# EAGLE board CT_schematic (EAGLE 7.6.0)

Size 100 x 80 mm. Coordinates in mm from the lower left corner, seen from the top.
Outline: 0,0 100,0 100,80 0,80 0,0
Copper layers (1*16): Top 0.035mm / dielectric 1.5mm / Bottom 0.035mm
Design rules "default": minimum track width 10mil, minimum drill 24mil, track to track 8mil, track to pad 8mil, pad to pad 8mil, via to via 8mil, smd to smd 8mil, copper to edge 40mil, drill to drill 8mil, minimum pad ring 10mil, minimum via ring 8mil, stop-mask expansion 4mil, vias tented up to drill 0mil, thermal gap 10mil

## Footprints (pad centres in the part's own frame; a part is rotated, then mirrored left to right if it is on the bottom)
C0603 = smd 0.8 x 0.8: 1 -0.762,0; 2 0.762,0
C0402 = smd 0.5 x 0.5: 1 -0.508,0; 2 0.508,0
C1210 = smd 1.2 x 2.5: 1 -1.524,0; 2 1.524,0
C0805 = smd 1.2 x 1.3: 1 -1.016,0; 2 1.016,0
EXV-9B = smd 2.718 x 1.778: 1 -2.108,0; 2 2.108,0
EXV-9H = smd 3.505 x 1.676: 1 -2.857,0; 2 2.857,0
L0603 = smd 0.8 x 0.8: 1 -0.762,0; 2 0.762,0
PJ-037B_PACKAGE = drill 3.7 square: 1 12,0 | drill 3.2 square: 2 6,0
R0603 = smd 0.8 x 0.8: 1 -0.762,0; 2 0.762,0
LQFP208 = smd 0.3 x 1.2: 1 -12.75,-14.4; 2 -12.25,-14.4; 3 -11.75,-14.4; 4 -11.25,-14.4; 5 -10.75,-14.4; 6 -10.25,-14.4; 7 -9.75,-14.4; 8 -9.25,-14.4; 9 -8.75,-14.4; 10 -8.25,-14.4; 11 -7.75,-14.4; 12 -7.25,-14.4; 13 -6.75,-14.4; 14 -6.25,-14.4; 15 -5.75,-14.4; 16 -5.25,-14.4; 17 -4.75,-14.4; 18 -4.25,-14.4; 19 -3.75,-14.4; 20 -3.25,-14.4; 21 -2.75,-14.4; 22 -2.25,-14.4; 23 -1.75,-14.4; 24 -1.25,-14.4; 25 -0.75,-14.4; 26 -0.25,-14.4; 27 0.25,-14.4; 28 0.75,-14.4; 29 1.25,-14.4; 30 1.75,-14.4; 31 2.25,-14.4; 32 2.75,-14.4; 33 3.25,-14.4; 34 3.75,-14.4; 35 4.25,-14.4; 36 4.75,-14.4; 37 5.25,-14.4; 38 5.75,-14.4; 39 6.25,-14.4; 40 6.75,-14.4; 41 7.25,-14.4; 42 7.75,-14.4; 43 8.25,-14.4; 44 8.75,-14.4; 45 9.25,-14.4; 46 9.75,-14.4; 47 10.25,-14.4; 48 10.75,-14.4; 49 11.25,-14.4; 50 11.75,-14.4; 51 12.25,-14.4; 52 12.75,-14.4; 105 12.75,14.4; 106 12.25,14.4; 107 11.75,14.4; 108 11.25,14.4; 109 10.75,14.4; 110 10.25,14.4; 111 9.75,14.4; 112 9.25,14.4; 113 8.75,14.4; 114 8.25,14.4; 115 7.75,14.4; 116 7.25,14.4; 117 6.75,14.4; 118 6.25,14.4; 119 5.75,14.4; 120 5.25,14.4; 121 4.75,14.4; 122 4.25,14.4; 123 3.75,14.4; 124 3.25,14.4; 125 2.75,14.4; 126 2.25,14.4; 127 1.75,14.4; 128 1.25,14.4; 129 0.75,14.4; 130 0.25,14.4; 131 -0.25,14.4; 132 -0.75,14.4; 133 -1.25,14.4; 134 -1.75,14.4; 135 -2.25,14.4; 136 -2.75,14.4; 137 -3.25,14.4; 138 -3.75,14.4; 139 -4.25,14.4; 140 -4.75,14.4; 141 -5.25,14.4; 142 -5.75,14.4; 143 -6.25,14.4; 144 -6.75,14.4; 145 -7.25,14.4; 146 -7.75,14.4; 147 -8.25,14.4; 148 -8.75,14.4; 149 -9.25,14.4; 150 -9.75,14.4; 151 -10.25,14.4; 152 -10.75,14.4; 153 -11.25,14.4; 154 -11.75,14.4; 155 -12.25,14.4; 156 -12.75,14.4 | smd 1.2 x 0.3: 53 14.4,-12.75; 54 14.4,-12.25; 55 14.4,-11.75; 56 14.4,-11.25; 57 14.4,-10.75; 58 14.4,-10.25; 59 14.4,-9.75; 60 14.4,-9.25; 61 14.4,-8.75; 62 14.4,-8.25; 63 14.4,-7.75; 64 14.4,-7.25; 65 14.4,-6.75; 66 14.4,-6.25; 67 14.4,-5.75; 68 14.4,-5.25; 69 14.4,-4.75; 70 14.4,-4.25; 71 14.4,-3.75; 72 14.4,-3.25; 73 14.4,-2.75; 74 14.4,-2.25; 75 14.4,-1.75; 76 14.4,-1.25; 77 14.4,-0.75; 78 14.4,-0.25; 79 14.4,0.25; 80 14.4,0.75; 81 14.4,1.25; 82 14.4,1.75; 83 14.4,2.25; 84 14.4,2.75; 85 14.4,3.25; 86 14.4,3.75; 87 14.4,4.25; 88 14.4,4.75; 89 14.4,5.25; 90 14.4,5.75; 91 14.4,6.25; 92 14.4,6.75; 93 14.4,7.25; 94 14.4,7.75; 95 14.4,8.25; 96 14.4,8.75; 97 14.4,9.25; 98 14.4,9.75; 99 14.4,10.25; 100 14.4,10.75; 101 14.4,11.25; 102 14.4,11.75; 103 14.4,12.25; 104 14.4,12.75; 157 -14.4,12.75; 158 -14.4,12.25; 159 -14.4,11.75; 160 -14.4,11.25; 161 -14.4,10.75; 162 -14.4,10.25; 163 -14.4,9.75; 164 -14.4,9.25; 165 -14.4,8.75; 166 -14.4,8.25; 167 -14.4,7.75; 168 -14.4,7.25; 169 -14.4,6.75; 170 -14.4,6.25; 171 -14.4,5.75; 172 -14.4,5.25; 173 -14.4,4.75; 174 -14.4,4.25; 175 -14.4,3.75; 176 -14.4,3.25; 177 -14.4,2.75; 178 -14.4,2.25; 179 -14.4,1.75; 180 -14.4,1.25; 181 -14.4,0.75; 182 -14.4,0.25; 183 -14.4,-0.25; 184 -14.4,-0.75; 185 -14.4,-1.25; 186 -14.4,-1.75; 187 -14.4,-2.25; 188 -14.4,-2.75; 189 -14.4,-3.25; 190 -14.4,-3.75; 191 -14.4,-4.25; 192 -14.4,-4.75; 193 -14.4,-5.25; 194 -14.4,-5.75; 195 -14.4,-6.25; 196 -14.4,-6.75; 197 -14.4,-7.25; 198 -14.4,-7.75; 199 -14.4,-8.25; 200 -14.4,-8.75; 201 -14.4,-9.25; 202 -14.4,-9.75; 203 -14.4,-10.25; 204 -14.4,-10.75; 205 -14.4,-11.25; 206 -14.4,-11.75; 207 -14.4,-12.25; 208 -14.4,-12.75
TST-110-05-T-D-RA = drill 1 pad 1.7 square: 1 0,0 | drill 1 pad 1.7: 2 0,2.54; 3 2.54,0; 4 2.54,2.54; 5 5.08,0; 6 5.08,2.54; 7 7.62,0; 8 7.62,2.54; 9 10.16,0; 10 10.16,2.54; 11 12.7,0; 12 12.7,2.54; 13 15.24,0; 14 15.24,2.54; 15 17.78,0; 16 17.78,2.54; 17 20.32,0; 18 20.32,2.54; 19 22.86,0; 20 22.86,2.54
88E3015A2NNP1C000 = smd 0.3 x 0.55: 1 0,0; 2 0.5,0; 3 1,0; 4 1.5,0; 5 2,0; 6 2.5,0; 7 3,0; 8 3.5,0; 9 4,0; 10 4.5,0; 11 5,0; 12 5.5,0; 13 6,0; 14 6.5,0; 29 6.5,7.5; 30 6,7.5; 31 5.5,7.5; 32 5,7.5; 33 4.5,7.5; 34 4,7.5; 35 3.5,7.5; 36 3,7.5; 37 2.5,7.5; 38 2,7.5; 39 1.5,7.5; 40 1,7.5; 41 0.5,7.5; 42 0,7.5 | smd 0.55 x 0.3: 15 7,0.5; 16 7,1; 17 7,1.5; 18 7,2; 19 7,2.5; 20 7,3; 21 7,3.5; 22 7,4; 23 7,4.5; 24 7,5; 25 7,5.5; 26 7,6; 27 7,6.5; 28 7,7; 43 -0.5,7; 44 -0.5,6.5; 45 -0.5,6; 46 -0.5,5.5; 47 -0.5,5; 48 -0.5,4.5; 49 -0.5,4; 50 -0.5,3.5; 51 -0.5,3; 52 -0.5,2.5; 53 -0.5,2; 54 -0.5,1.5; 55 -0.5,1; 56 -0.5,0.5 | smd 4.4 x 4.4: 57 3.25,3.75
7498011122R = smd 0.71 x 2.29: 1 -3.545,-3.18; 2 -2.525,-3.18; 3 -1.505,-3.18; 4 -0.485,-3.18; 5 0.535,-3.18; 6 1.555,-3.18; 8 3.595,-3.18; 9 5.635,-3.18; 10 6.655,-3.18; 11 -6.605,-3.18; 12 -5.585,-3.18 | smd 1.4 x 2.54: 13 -8.51,10.2; 14 8.51,10.2 | hole 1.4: -3.5,0; 3.5,0
DFN8-S = smd 0.6 x 0.4: 1 -2.69,1.905; 2 -2.69,0.635; 3 -2.69,-0.635; 4 -2.69,-1.905; 5 2.69,-1.905; 6 2.69,-0.635; 7 2.69,0.635; 8 2.69,1.905
SOIC-8 = smd 1.6 x 0.6: 1 -2.7,1.905 | smd 1.55 x 0.6: 2 -2.7,0.635; 3 -2.7,-0.635; 4 -2.7,-1.905; 5 2.7,-1.905; 6 2.7,-0.635; 7 2.7,0.635; 8 2.7,1.905
182-009-MALE = drill 1.194 pad 1.524 octagon: 1 -5.537,10.923; 2 -2.769,10.923; 3 0,10.923; 4 2.769,10.923; 5 5.537,10.923; 6 -4.153,8.08; 7 -1.384,8.08; 8 1.384,8.08; 9 4.153,8.08 | hole 3.048: -12.446,9.501; 12.446,9.501
VFBGA-63 = smd 0.4 x 0.4: A1 -3.6,4.4; A2 -2.8,4.4; A9 2.8,4.4; A10 3.6,4.4; B1 -3.6,3.6; B9 2.8,3.6; B10 3.6,3.6; C3 -2,2.8; C4 -1.2,2.8; C5 -0.4,2.8; C6 0.4,2.8; C7 1.2,2.8; C8 2,2.8; D3 -2,2; D4 -1.2,2; D5 -0.4,2; D6 0.4,2; D7 1.2,2; D8 2,2; E3 -2,1.2; E4 -1.2,1.2; E5 -0.4,1.2; E6 0.4,1.2; E7 1.2,1.2; E8 2,1.2; F3 -2,0.4; F4 -1.2,0.4; F5 -0.4,0.4; F6 0.4,0.4; F7 1.2,0.4; F8 2,0.4; G3 -2,-0.4; G4 -1.2,-0.4; G5 -0.4,-0.4; G6 0.4,-0.4; G7 1.2,-0.4; G8 2,-0.4; H3 -2,-1.2; H4 -1.2,-1.2; H5 -0.4,-1.2; H6 0.4,-1.2; H7 1.2,-1.2; H8 2,-1.2; J3 -2,-2; J4 -1.2,-2; J5 -0.4,-2; J6 0.4,-2; J7 1.2,-2; J8 2,-2; K3 -2,-2.8; K4 -1.2,-2.8; K5 -0.4,-2.8; K6 0.4,-2.8; K7 1.2,-2.8; K8 2,-2.8; L1 -3.6,-3.6; L2 -2.8,-3.6; L9 2.8,-3.6; L10 3.6,-3.6; M1 -3.6,-4.4; M2 -2.8,-4.4; M9 2.8,-4.4; M10 3.6,-4.4
QFN-24 = smd 0.7 x 0.305: 1 -1.815,1.25; 2 -1.815,0.75; 3 -1.815,0.25; 4 -1.815,-0.25; 5 -1.815,-0.73; 6 -1.815,-1.25; 13 1.815,-1.25; 14 1.815,-0.75; 15 1.815,-0.25; 16 1.815,0.25; 17 1.815,0.75; 18 1.815,1.25 | smd 0.305 x 0.7: 7 -1.25,-1.815; 8 -0.75,-1.815; 9 -0.25,-1.815; 10 0.25,-1.815; 11 0.75,-1.815; 12 1.25,-1.815; 19 1.25,1.815; 20 0.75,1.815; 21 0.25,1.815; 22 -0.25,1.815; 23 -0.75,1.815; 24 -1.25,1.815 | smd 2.591 x 2.591: 25 0,0
MICRO_USB_AB = smd 0.4 x 1.35: 1 1.3,0.26; 2 0.65,0.26; 3 0,0.26; 4 -0.65,0.26; 5 -1.3,0.26 | drill 0.6 pad 0.95 long: 6 4.175,-2.54; 7 -4.175,-2.54 | drill 0.7 pad 1.1 long: 8 -2.225,0.46; 9 2.225,0.46
SOT143B = smd 1 x 0.7: 1 -0.75,-1 | smd 0.6 x 0.7: 2 0.95,-1; 3 0.95,1; 4 -0.95,1
SOT-23-6 = smd 1.1 x 0.6: 1 -1.4,0.95; 2 -1.4,0; 3 -1.4,-0.95; 4 1.4,-0.95; 5 1.4,0; 6 1.4,0.95
ASEK = smd 1.4 x 1: 1 -1.1,-0.8; 2 1.1,-0.8; 3 1.1,0.8; 4 -1.1,0.8
ASFL1 = smd 1.7 x 1.5: 1 -1.27,-1.1; 2 1.27,-1.1; 3 1.27,1.1; 4 -1.27,1.1
IDT74FCT38072 = smd 0.51 x 1: 1 0,0; 2 1.27,0; 3 2.54,0; 4 3.81,0; 5 3.81,4.95; 6 2.54,4.95; 7 1.27,4.95; 8 0,4.95
WSON-8 = smd 0.3 x 0.6: 1 -0.75,0; 2 0.05,0; 3 0.85,0; 4 1.65,0; 5 1.65,3.8; 6 0.85,3.8; 7 0.05,3.8; 8 -0.75,3.8 | smd 3 x 2.6: PAD 0.45,1.9
LP2954 = smd 1.6 x 0.6: 1 -2.475,1.905 | smd 1.55 x 0.6: 2 -2.475,0.635; 3 -2.475,-0.635; 4 -2.475,-1.905; 5 2.475,-1.905; 6 2.475,-0.635; 7 2.475,0.635; 8 2.475,1.905
SOIC-8_EP = smd 1.6 x 0.533: 1 -2.921,1.905; 2 -2.921,0.635; 3 -2.921,-0.635; 4 -2.921,-1.905; 5 2.921,-1.905; 6 2.921,-0.635; 7 2.921,0.635; 8 2.921,1.905 | smd 2.54 x 3.302: EPAD 0,0 | drill 0.406 pad 0.406: P$1 -0.508,0.635; P$2 0.381,0.635; P$3 -0.508,-0.635; P$4 0.381,-0.635
SON-6 = smd 0.55 x 0.3: 1 -0.355,0.5 | smd 0.52 x 0.3: 2 -0.37,0; 3 -0.37,-0.5; 4 0.37,-0.5; 5 0.37,0; 6 0.37,0.5
SW_4-1437565-2 = smd 1.4 x 2.1: 1 -2.23,4.55; 2 -2.23,-4.55; 3 2.23,4.55; 4 2.23,-4.55
LGM67K-G1J2-24-Z = smd 0.8 x 1.4: A -2,0; C 0,0
NC7SZ125M5X = smd 1.3 x 0.7: 1 -1.3,0.95; 2 -1.3,0; 3 -1.3,-0.95; 4 1.3,-0.95; 5 1.3,0.95

## Placement (x,y rotation side)
C1  1e-06  [C0603]  -34.29,91.44 0 top  (outside the outline)
C2  1e-07  [C0603]  -38.1,91.44 0 top  (outside the outline)
C3  1e-07  [C0603]  -41.91,91.44 0 top  (outside the outline)
C4  1e-07  [C0603]  -45.72,91.44 0 top  (outside the outline)
C5  1e-07  [C0603]  -49.53,91.44 0 top  (outside the outline)
C6  1e-07  [C0603]  -53.34,91.44 0 top  (outside the outline)
C7  1e-07  [C0603]  -57.15,91.44 0 top  (outside the outline)
C8  1e-07  [C0603]  -60.96,91.44 0 top  (outside the outline)
C9  1e-07  [C0603]  -64.77,91.44 0 top  (outside the outline)
C10  1e-07  [C0603]  -68.58,91.44 0 top  (outside the outline)
C11  1e-07  [C0603]  -72.39,91.44 0 top  (outside the outline)
C12  1e-07  [C0603]  -76.2,91.44 0 top  (outside the outline)
C13  1e-07  [C0603]  -80.01,91.44 0 top  (outside the outline)
C14  1e-07  [C0603]  -83.82,91.44 0 top  (outside the outline)
C15  1e-07  [C0603]  -87.63,91.44 0 top  (outside the outline)
C16  1e-07  [C0603]  -91.44,91.44 0 top  (outside the outline)
C17  1e-07  [C0603]  -95.25,91.44 0 top  (outside the outline)
C18  1e-07  [C0603]  -99.06,91.44 0 top  (outside the outline)
C19  1e-07  [C0603]  -102.87,91.44 0 top  (outside the outline)
C20  4.7e-06  [C0603]  -15.24,91.44 0 top  (outside the outline)
C21  2.2e-06  [C0603]  -19.05,91.44 0 top  (outside the outline)
C22  2.2e-06  [C0603]  -22.86,91.44 0 top  (outside the outline)
C23  1e-08  [C0603]  -15.24,96.52 0 top  (outside the outline)
C24  1e-06  [C0603]  -19.05,96.52 0 top  (outside the outline)
C25  1e-07  [C0402]  -54.61,101.6 0 top  (outside the outline)
C26  1e-07  [C0402]  -58.42,101.6 0 top  (outside the outline)
C27  2.2e-08  [C0402]  -50.8,101.6 0 top  (outside the outline)
C28  1e-07  [C0603]  -22.86,96.52 0 top  (outside the outline)
C29  1e-07  [C0603]  -26.67,96.52 0 top  (outside the outline)
C30  1e-07  [C0603]  -30.48,96.52 0 top  (outside the outline)
C31  1e-07  [C0603]  -34.29,96.52 0 top  (outside the outline)
C32  1e-07  [C0603]  -38.1,96.52 0 top  (outside the outline)
C33  1e-07  [C0603]  -41.91,96.52 0 top  (outside the outline)
C34  1e-08  [C0402]  -62.23,101.6 0 top  (outside the outline)
C35  1e-06  [C0603]  -45.72,96.52 0 top  (outside the outline)
C36  1e-06  [C0603]  -49.53,96.52 0 top  (outside the outline)
C37  1e-07  [C0402]  -66.04,101.6 0 top  (outside the outline)
C38  1e-07  [C0402]  -69.85,101.6 0 top  (outside the outline)
C39  1e-07  [C0402]  -73.66,101.6 0 top  (outside the outline)
C40  1e-07  [C0402]  -77.47,101.6 0 top  (outside the outline)
C41  2.2e-06  [C0603]  -26.67,91.44 0 top  (outside the outline)
C42  1e-08  [C0402]  -81.28,101.6 0 top  (outside the outline)
C43  2.2e-06  [C0603]  -30.48,91.44 0 top  (outside the outline)
C44  1e-08  [C0402]  -85.09,101.6 0 top  (outside the outline)
C45  1e-08  [C0402]  -88.9,101.6 0 top  (outside the outline)
C46  1e-06  [C0603]  -53.34,96.52 0 top  (outside the outline)
C47  1e-08  [C0402]  -92.71,101.6 0 top  (outside the outline)
C48  1e-08  [C0402]  -96.52,101.6 0 top  (outside the outline)
C49  1e-08  [C0402]  -100.33,101.6 0 top  (outside the outline)
C50  1e-08  [C0402]  -104.14,101.6 0 top  (outside the outline)
C51  1e-08  [C0402]  -15.24,106.68 0 top  (outside the outline)
C52  1e-05  [C1210]  -87.63,67.31 0 top  (outside the outline)
C53  1e-05  [C0805]  -90.17,74.93 0 top  (outside the outline)
C54  1e-08  [C0402]  -19.05,106.68 0 top  (outside the outline)
C55  1e-05  [C1210]  -93.98,67.31 0 top  (outside the outline)
C56  1e-05  [C0805]  -95.25,74.93 0 top  (outside the outline)
C57  1e-06  [EXV-9B]  -49.53,74.93 0 top  (outside the outline)
C58  2.2e-06  [EXV-9B]  -58.42,74.93 0 top  (outside the outline)
C59  1e-05  [C1210]  -100.33,67.31 0 top  (outside the outline)
C60  1e-05  [C1210]  -16.51,76.2 0 top  (outside the outline)
C61  1e-05  [C1210]  -22.86,76.2 0 top  (outside the outline)
C62  1e-05  [C1210]  -29.21,76.2 0 top  (outside the outline)
C63  1e-08  [C0402]  -22.86,106.68 0 top  (outside the outline)
C64  1e-05  [C1210]  -35.56,76.2 0 top  (outside the outline)
C65  1e-05  [C1210]  -41.91,76.2 0 top  (outside the outline)
C66  1e-07  [C0402]  -26.67,106.68 0 top  (outside the outline)
C67  0.0001  [EXV-9H]  -38.1,68.58 0 top  (outside the outline)
C68  0.0001  [EXV-9H]  -49.53,68.58 0 top  (outside the outline)
C69  1e-08  [C0402]  -30.48,106.68 0 top  (outside the outline)
C70  1e-08  [C0402]  -34.29,106.68 0 top  (outside the outline)
C71  1e-08  [C0402]  -38.1,106.68 0 top  (outside the outline)
F1  240.0  [L0603]  -57.15,96.52 0 top  (outside the outline)
J1  PJ-037B  [PJ-037B_PACKAGE]  -27.94,38.1 0 top  (outside the outline)
R2  1000.0  [R0603]  -60.96,96.52 0 top  (outside the outline)
R4  4700.0  [R0603]  -64.77,96.52 0 top  (outside the outline)
R5  4700.0  [R0603]  -68.58,96.52 0 top  (outside the outline)
R6  2200.0  [R0603]  -72.39,96.52 0 top  (outside the outline)
R7  2200.0  [R0603]  -76.2,96.52 0 top  (outside the outline)
R8  2200.0  [R0603]  -80.01,96.52 0 top  (outside the outline)
R9  2200.0  [R0603]  -83.82,96.52 0 top  (outside the outline)
R10  10000.0  [R0603]  -69.85,81.28 0 top  (outside the outline)
R11  10000.0  [R0603]  -74.93,81.28 0 top  (outside the outline)
R12  10000.0  [R0603]  -80.01,81.28 0 top  (outside the outline)
R13  10000.0  [R0603]  -85.09,81.28 0 top  (outside the outline)
R14  10000.0  [R0603]  -90.17,81.28 0 top  (outside the outline)
R15  10000.0  [R0603]  -95.25,81.28 0 top  (outside the outline)
R16  10000.0  [R0603]  -100.33,81.28 0 top  (outside the outline)
R17  10000.0  [R0603]  -15.24,86.36 0 top  (outside the outline)
R18  10000.0  [R0603]  -20.32,86.36 0 top  (outside the outline)
R19  0.1  [R0603]  -87.63,96.52 0 top  (outside the outline)
R20  0.1  [R0603]  -91.44,96.52 0 top  (outside the outline)
R21  200.0  [R0603]  -95.25,96.52 0 top  (outside the outline)
R22  200.0  [R0603]  -99.06,96.52 0 top  (outside the outline)
R23  10000.0  [R0603]  -25.4,86.36 0 top  (outside the outline)
R24  10000.0  [R0603]  -30.48,86.36 0 top  (outside the outline)
R25  10000.0  [R0603]  -35.56,86.36 0 top  (outside the outline)
R26  2000.0  [R0603]  -102.87,96.52 0 top  (outside the outline)
R27  10000.0  [R0603]  -40.64,86.36 0 top  (outside the outline)
R28  10000.0  [R0603]  -45.72,86.36 0 top  (outside the outline)
R29  10000.0  [R0603]  -50.8,86.36 0 top  (outside the outline)
R30  10000.0  [R0603]  -55.88,86.36 0 top  (outside the outline)
R31  120.0  [R0603]  -15.24,101.6 0 top  (outside the outline)
R32  10000.0  [R0603]  -60.96,86.36 0 top  (outside the outline)
R33  10000.0  [R0603]  -66.04,86.36 0 top  (outside the outline)
R34  10000.0  [R0603]  -71.12,86.36 0 top  (outside the outline)
R35  10000.0  [R0603]  -76.2,86.36 0 top  (outside the outline)
R36  10000.0  [R0603]  -81.28,86.36 0 top  (outside the outline)
R37  47000.0  [R0603]  -86.36,86.36 0 top  (outside the outline)
R38  8060.0  [R0603]  -19.05,101.6 0 top  (outside the outline)
R39  100000.0  [R0603]  -29.21,81.28 0 top  (outside the outline)
R40  200.0  [R0603]  -22.86,101.6 0 top  (outside the outline)
R41  1000.0  [R0603]  -26.67,101.6 0 top  (outside the outline)
R42  100000.0  [R0603]  -34.29,81.28 0 top  (outside the outline)
R43  806.0  [R0603]  -30.48,101.6 0 top  (outside the outline)
R44  1000.0  [R0603]  -34.29,101.6 0 top  (outside the outline)
R45  100000.0  [R0603]  -39.37,81.28 0 top  (outside the outline)
R46  100000.0  [R0603]  -44.45,81.28 0 top  (outside the outline)
R47  101022.32  [R0603]  -24.13,81.28 0 top  (outside the outline)
R48  100000.0  [R0603]  -49.53,81.28 0 top  (outside the outline)
R49  4031.5447154472  [R0603]  -19.05,81.28 0 top  (outside the outline)
R50  2200.0  [R0603]  -38.1,101.6 0 top  (outside the outline)
R51  100000.0  [R0603]  -54.61,81.28 0 top  (outside the outline)
R52  3900.0  [R0603]  -41.91,101.6 0 top  (outside the outline)
R53  1000.0  [R0603]  -45.72,101.6 0 top  (outside the outline)
R54  10000.0  [R0603]  -91.44,86.36 0 top  (outside the outline)
R55  10000.0  [R0603]  -96.52,86.36 0 top  (outside the outline)
R56  82000.0  [R0603]  -101.6,86.36 0 top  (outside the outline)
R57  300000.0  [R0603]  -59.69,81.28 0 top  (outside the outline)
R58  120000.0  [R0603]  -64.77,81.28 0 top  (outside the outline)
U1  STM32F439BGT6  [LQFP208]  -27.94,15.24 0 top  (outside the outline)
U2  TST-110-05-T-D-RA  [TST-110-05-T-D-RA]  -99.06,55.88 0 top  (outside the outline)
U3  88E3015A2NNP1C000  [88E3015A2NNP1C000]  -58.42,33.02 0 top  (outside the outline)
U4  7498011122R  [7498011122R]  -53.34,7.62 0 top  (outside the outline)
U5  24AA512-I/MF  [DFN8-S]  -101.6,35.56 0 top  (outside the outline)
U6  MCP2562-E/SN  [SOIC-8]  -39.37,49.53 0 top  (outside the outline)
U7  182-009-113R531  [182-009-MALE]  -86.36,6.35 0 top  (outside the outline)
U8  mt29f4g08abbdah4  [VFBGA-63]  -34.29,36.83 0 top  (outside the outline)
U9  USB3317C-CP-TR  [QFN-24]  -80.01,67.31 0 top  (outside the outline)
U10  47590-0001  [MICRO_USB_AB]  -67.31,38.1 0 top  (outside the outline)
U11  prtr5v0u2ax  [SOT143B]  -50.8,106.68 0 top  (outside the outline)
U12  MAX4995AAUT+T  [SOT-23-6]  -66.04,74.93 0 top  (outside the outline)
U13  ASEK-32.768KHz-ECST  [ASEK]  -29.21,68.58 0 top  (outside the outline)
U14  ASFL1-25MHZ-NCS  [ASFL1]  -26.67,59.69 0 top  (outside the outline)
U15  idt74fct38072  [IDT74FCT38072]  -63.5,55.88 0 top  (outside the outline)
U16  ASFL1-26MHZ-NCS  [ASFL1]  -43.18,59.69 0 top  (outside the outline)
U17  LP3878SDX-ADJ/NOPB  [WSON-8]  -60.96,48.26 0 top  (outside the outline)
U18  LP3878SDX-ADJ/NOPB  [WSON-8]  -81.28,48.26 0 top  (outside the outline)
U19  LP2954AIMX/NOPB  [LP2954]  -25.4,49.53 0 top  (outside the outline)
U20  MIC5234YME  [SOIC-8_EP]  -59.69,67.31 0 top  (outside the outline)
U21  LP3878SDX-ADJ/NOPB  [WSON-8]  -101.6,48.26 0 top  (outside the outline)
U22  TPS3895ADRYR  [SON-6]  -54.61,105.41 0 top  (outside the outline)
U23  4-1437565-2  [SW_4-1437565-2]  -87.63,36.83 0 top  (outside the outline)
U24  Q65110A2395  [LGM67K-G1J2-24-Z]  -68.58,67.31 0 top  (outside the outline)
U25  nc7sz125m5x  [NC7SZ125M5X]  -71.12,74.93 0 top  (outside the outline)
U26  nc7sz125m5x  [NC7SZ125M5X]  -77.47,74.93 0 top  (outside the outline)
U27  nc7sz125m5x  [NC7SZ125M5X]  -83.82,74.93 0 top  (outside the outline)

## Library data of the parts
C1-C71 F1 J1 R2 R4-R58 U1-U27 = circuit_tree

## Nets
CLK_U1_9: U1.9 U13.3
CLK_U1_32: U1.32 U15.7
CLK_U3_32: U3.32 U15.6
CLK_U9_23: U9.23 U16.3
CLK_U15_3: U14.3 U15.3
GND: C1.2 C2.2 C3.2 C4.2 C5.2 C6.2 C7.2 C8.2 C9.2 C10.2 C11.2 C12.2 C13.2 C14.2 C15.2 C16.2 C17.2 C18.2 C19.2 C20.2 C21.2 C22.2 C23.2 C24.2 C25.2 C26.2 C27.2 C28.2 C29.2 C30.2 C31.2 C32.2 C33.2 C34.2 C35.2 C36.2 C37.2 C38.2 C39.2 C40.2 C41.2 C42.2 C43.2 C44.2 C45.2 C46.2 C47.2 C48.2 C49.2 C50.2 C51.2 C52.2 C53.2 C54.2 C55.2 C56.2 C57.2 C58.2 C59.2 C60.2 C61.2 C62.2 C63.2 C64.2 C65.2 C66.2 C67.2 C68.2 C69.2 C70.2 C71.2 J1.2 R2.2 R12.2 R18.2 R19.2 R20.2 R26.2 R27.2 R29.2 R37.2 R38.2 R41.2 R44.2 R48.2 R50.2 R53.2 R56.2 R58.2 U1.14 U1.25 U1.40 U1.51 U1.60 U1.72 U1.82 U1.93 U1.114 U1.125 U1.136 U1.149 U1.170 U1.184 U1.202 U2.4 U2.6 U2.8 U2.10 U2.12 U2.14 U2.16 U2.18 U2.20 U3.1 U3.2 U3.57 U4.10 U4.12 U5.4 U5.7 U6.2 U6.8 U7.5 U8.C5 U8.F7 U8.K3 U8.K8 U9.25 U10.5 U10.6 U10.7 U10.8 U10.9 U11.1 U12.2 U13.2 U14.2 U15.4 U15.5 U15.8 U16.2 U17.3 U17.PAD U18.3 U18.PAD U19.4 U20.7 U20.EPAD U21.3 U21.PAD U22.2 U24.C U25.2 U25.3 U26.1 U26.3 U27.1 U27.3
NET_U1_34: R4.1 U1.34 U26.4
NET_U1_36: R8.1
NET_U1_42: C23.1 C24.1 F1.1 U1.41 U1.42
NET_U1_45: R9.1
NET_U1_63: R12.1 U1.63
NET_U1_92: C21.1 U1.92
NET_U1_148: C22.1 U1.148
NET_U1_195: R6.1 U1.195 U5.6
NET_U1_196: R7.1 U1.196 U5.5
NET_U1_197: R11.1 U1.197
NET_U1_203: R10.1 U1.203
NET_U1_207: U24.A
NET_U1_208: U23.3 U23.4
NET_U2_19: R18.1 U2.19
NET_U3_3: U3.3
NET_U3_9: R24.1 U3.9
NET_U3_10: R27.1 U3.10
NET_U3_16: R23.1 U3.16
NET_U3_19: U3.19
NET_U3_28: R26.1 U3.28
NET_U3_39: R25.1 U3.39
NET_U3_44: U3.44 U3.48 U3.49 U3.56
NET_U4_1: U3.26 U4.1
NET_U4_3: U3.25 U4.3
NET_U4_4: U3.23 U4.4
NET_U4_5: C27.1 U4.2 U4.5
NET_U4_6: U3.22 U4.6
NET_U4_7: R21.2
NET_U4_8: R20.1 R22.2 U4.8
NET_U4_9: R21.1 U4.9
NET_U4_11: R22.1 U4.11
NET_U4_13: R19.1 U4.13 U4.14
NET_U5_1: R28.1 U5.1
NET_U5_2: R29.1 U5.2
NET_U5_3: R30.1 U5.3
NET_U6_6: R31.2 U6.6
NET_U7_2: R31.2 U6.6 U7.2
NET_U7_3: R31.1 U6.7 U7.3
NET_U8_C3: R36.1 U8.C3
NET_U9_4: C43.1 U9.4
NET_U9_22: R5.1 U9.22 U27.4
NET_U9_24: R38.1 U9.24
NET_U10_1: C46.1 U9.2 U10.1 U11.4 U12.1
NET_U10_2: U9.5 U10.2 U11.3
NET_U10_3: U9.6 U10.3 U11.2
NET_U10_4: U9.1 U10.4
NET_U12_1: U12.1
NET_U12_3: R37.1 U12.3
NET_U12_4: U9.7 U12.4
NET_U17_1: C51.1 U17.1
NET_U17_6: R40.2 R41.1 U17.6
NET_U17_8: R39.1 U17.8
NET_U18_1: C54.1 U18.1
NET_U18_6: R43.2 R44.1 U18.6
NET_U18_8: R42.1 U18.8
NET_U19_3: R46.1 U19.3
NET_U19_5: R45.1 U19.5
NET_U19_7: R47.2 R48.1 U19.7
NET_U20_4: R49.2 R50.1 U20.4
NET_U21_1: C63.1 U21.1
NET_U21_6: R52.2 R53.1 U21.6
NET_U21_8: R51.1 U21.8
NET_U22_1: R55.1 R56.1 U22.1
NET_U22_3: R57.2 R58.1 U22.3
NET_U22_4: R54.1 U22.4 U25.4 U26.2 U27.2
NET_U23_1: R2.1 U23.1 U23.2
PROC_CAN1_RX: U1.11 U6.4
PROC_CAN1_TX: U1.146 U6.1
PROC_FMC_A16: U1.111 U8.D5
PROC_FMC_A17: U1.112 U8.C4
PROC_FMC_D0: U1.116 U8.H4
PROC_FMC_D1: U1.117 U8.J4
PROC_FMC_D2: U1.164 U8.K4
PROC_FMC_D3: U1.165 U8.K5
PROC_FMC_D4: U1.79 U8.K6
PROC_FMC_D5: U1.80 U8.J7
PROC_FMC_D6: U1.81 U8.K7
PROC_FMC_D7: U1.84 U8.J8
PROC_FMC_INT2: R32.1 U1.133 U8.C8
PROC_FMC_NCE2: R33.1 U1.173 U8.C6
PROC_FMC_NOE: R35.1 U1.168 U8.D4
PROC_FMC_NWE: R34.1 U1.169 U8.C7
PROC_SYS_JTCK_SWCLK: R16.1 U1.159 U2.9
PROC_SYS_JTDI: R14.1 U1.160 U2.5
PROC_SYS_JTDO_SWO: U1.192 U2.13
PROC_SYS_JTMS_SWDIO: R15.1 U1.147 U2.7
PROC_SYS_JTRST: R13.1 U1.193 U2.3
PROC_USB_OTG_HS_ULPI_CK: U1.54 U9.12
PROC_USB_OTG_HS_ULPI_D0: U1.50 U9.16
PROC_USB_OTG_HS_ULPI_D1: U1.61 U9.15
PROC_USB_OTG_HS_ULPI_D2: U1.62 U9.14
PROC_USB_OTG_HS_ULPI_D3: U1.90 U9.13
PROC_USB_OTG_HS_ULPI_D4: U1.91 U9.11
PROC_USB_OTG_HS_ULPI_D5: U1.104 U9.10
PROC_USB_OTG_HS_ULPI_D6: U1.105 U9.9
PROC_USB_OTG_HS_ULPI_D7: U1.194 U9.8
PROC_USB_OTG_HS_ULPI_DIR: U1.13 U9.19
PROC_USB_OTG_HS_ULPI_NXT: U1.48 U9.18
PROC_USB_OTG_HS_ULPI_STP: U1.35 U9.20
RST_OUT_U2_SRESET_B: R17.1 U2.15 U25.1
VCC_S1_12V4: C52.1 C55.1 C57.1 C59.1 C60.1 C64.1 C67.1 C68.1 J1.1 R39.2 R42.2 R46.2 R51.2 U17.4 U18.4 U19.8 U20.5 U20.8 U21.4
VCC_TIER1_1V2: C53.1 R40.1 U17.5
VCC_TIER1_1V8: C1.1 C2.1 C3.1 C4.1 C5.1 C6.1 C7.1 C8.1 C9.1 C10.1 C11.1 C12.1 C13.1 C14.1 C15.1 C16.1 C17.1 C18.1 C19.1 C20.1 C26.1 C34.1 C36.1 C37.1 C38.1 C39.1 C40.1 C41.1 C44.1 C45.1 C56.1 C66.1 C69.1 C70.1 C71.1 F1.2 R4.2 R5.2 R6.2 R7.2 R8.2 R9.2 R10.2 R11.2 R13.2 R14.2 R15.2 R16.2 R17.2 R28.2 R30.2 R32.2 R33.2 R34.2 R35.2 R36.2 R43.1 R54.2 R55.2 R57.1 U1.6 U1.15 U1.26 U1.39 U1.52 U1.59 U1.73 U1.83 U1.94 U1.103 U1.115 U1.124 U1.137 U1.150 U1.158 U1.171 U1.185 U1.204 U2.1 U5.8 U6.5 U8.D3 U8.G4 U8.H8 U8.J6 U9.17 U9.21 U18.5 U22.6 U25.5 U26.5 U27.5
VCC_TIER1_2V5: C28.1 C29.1 C30.1 C31.1 C32.1 C33.1 C58.1 R23.2 R24.2 R25.2 R45.2 R47.1 U3.4 U3.6 U3.11 U3.12 U3.13 U3.20 U3.24 U3.29 U3.34 U3.36 U4.2 U19.1
VCC_TIER1_3V3: C25.1 C42.1 C47.1 C48.1 C49.1 C50.1 C61.1 C62.1 R49.1 U2.2 U9.3 U13.4 U14.4 U15.1 U15.2 U16.4 U20.1
VCC_TIER1_5V0: C35.1 C65.1 R52.1 U6.3 U12.5 U21.5

## Tracks (layer width: path | path; a pad name or v marks a point on that pad's centre or on a via)
CLK_U1_9  (1 unrouted)
CLK_U1_32  (1 unrouted)
CLK_U3_32  (1 unrouted)
CLK_U9_23  (1 unrouted)
CLK_U15_3  (1 unrouted)
GND  (157 unrouted)
NET_U1_34  (2 unrouted)
NET_U1_42  (4 unrouted)
NET_U1_63  (1 unrouted)
NET_U1_92  (1 unrouted)
NET_U1_148  (1 unrouted)
NET_U1_195  (2 unrouted)
NET_U1_196  (2 unrouted)
NET_U1_197  (1 unrouted)
NET_U1_203  (1 unrouted)
NET_U1_208  (1 unrouted)
NET_U2_19  (1 unrouted)
NET_U3_9  (1 unrouted)
NET_U3_10  (1 unrouted)
NET_U3_16  (1 unrouted)
NET_U3_28  (1 unrouted)
NET_U3_39  (1 unrouted)
NET_U3_44  (3 unrouted)
NET_U4_1  (1 unrouted)
NET_U4_3  (1 unrouted)
NET_U4_4  (1 unrouted)
NET_U4_5  (2 unrouted)
NET_U4_6  (1 unrouted)
NET_U4_8  (2 unrouted)
NET_U4_9  (1 unrouted)
NET_U4_11  (1 unrouted)
NET_U4_13  (2 unrouted)
NET_U5_1  (1 unrouted)
NET_U5_2  (1 unrouted)
NET_U5_3  (1 unrouted)
NET_U6_6  (1 unrouted)
NET_U7_2  (2 unrouted)
NET_U7_3  (2 unrouted)
NET_U8_C3  (1 unrouted)
NET_U9_4  (1 unrouted)
NET_U9_22  (2 unrouted)
NET_U9_24  (1 unrouted)
NET_U10_1  (4 unrouted)
NET_U10_2  (2 unrouted)
NET_U10_3  (2 unrouted)
NET_U10_4  (1 unrouted)
NET_U12_3  (1 unrouted)
NET_U12_4  (1 unrouted)
NET_U17_1  (1 unrouted)
NET_U17_6  (2 unrouted)
NET_U17_8  (1 unrouted)
NET_U18_1  (1 unrouted)
NET_U18_6  (2 unrouted)
NET_U18_8  (1 unrouted)
NET_U19_3  (1 unrouted)
NET_U19_5  (1 unrouted)
NET_U19_7  (2 unrouted)
NET_U20_4  (2 unrouted)
NET_U21_1  (1 unrouted)
NET_U21_6  (2 unrouted)
NET_U21_8  (1 unrouted)
NET_U22_1  (2 unrouted)
NET_U22_3  (2 unrouted)
NET_U22_4  (4 unrouted)
NET_U23_1  (2 unrouted)
PROC_CAN1_RX  (1 unrouted)
PROC_CAN1_TX  (1 unrouted)
PROC_FMC_A16  (1 unrouted)
PROC_FMC_A17  (1 unrouted)
PROC_FMC_D0  (1 unrouted)
PROC_FMC_D1  (1 unrouted)
PROC_FMC_D2  (1 unrouted)
PROC_FMC_D3  (1 unrouted)
PROC_FMC_D4  (1 unrouted)
PROC_FMC_D5  (1 unrouted)
PROC_FMC_D6  (1 unrouted)
PROC_FMC_D7  (1 unrouted)
PROC_FMC_INT2  (2 unrouted)
PROC_FMC_NCE2  (2 unrouted)
PROC_FMC_NOE  (2 unrouted)
PROC_FMC_NWE  (2 unrouted)
PROC_SYS_JTCK_SWCLK  (2 unrouted)
PROC_SYS_JTDI  (2 unrouted)
PROC_SYS_JTDO_SWO  (1 unrouted)
PROC_SYS_JTMS_SWDIO  (2 unrouted)
PROC_SYS_JTRST  (2 unrouted)
PROC_USB_OTG_HS_ULPI_CK  (1 unrouted)
PROC_USB_OTG_HS_ULPI_D0  (1 unrouted)
PROC_USB_OTG_HS_ULPI_D1  (1 unrouted)
PROC_USB_OTG_HS_ULPI_D2  (1 unrouted)
PROC_USB_OTG_HS_ULPI_D3  (1 unrouted)
PROC_USB_OTG_HS_ULPI_D4  (1 unrouted)
PROC_USB_OTG_HS_ULPI_D5  (1 unrouted)
PROC_USB_OTG_HS_ULPI_D6  (1 unrouted)
PROC_USB_OTG_HS_ULPI_D7  (1 unrouted)
PROC_USB_OTG_HS_ULPI_DIR  (1 unrouted)
PROC_USB_OTG_HS_ULPI_NXT  (1 unrouted)
PROC_USB_OTG_HS_ULPI_STP  (1 unrouted)
RST_OUT_U2_SRESET_B  (2 unrouted)
VCC_S1_12V4  (18 unrouted)
VCC_TIER1_1V2  (2 unrouted)
VCC_TIER1_1V8  (91 unrouted)
VCC_TIER1_2V5  (23 unrouted)
VCC_TIER1_3V3  (16 unrouted)
VCC_TIER1_5V0  (5 unrouted)